# Altium PCB pickit.PcbDoc
Units mm, origin at the board's own origin, x right, y up, seen from the top; angles counter-clockwise.
Board outline 56 x 91 mm, 2 copper layers (Top Layer, Bottom Layer); 73 components, 57 nets, 243 pads, 48 vias.
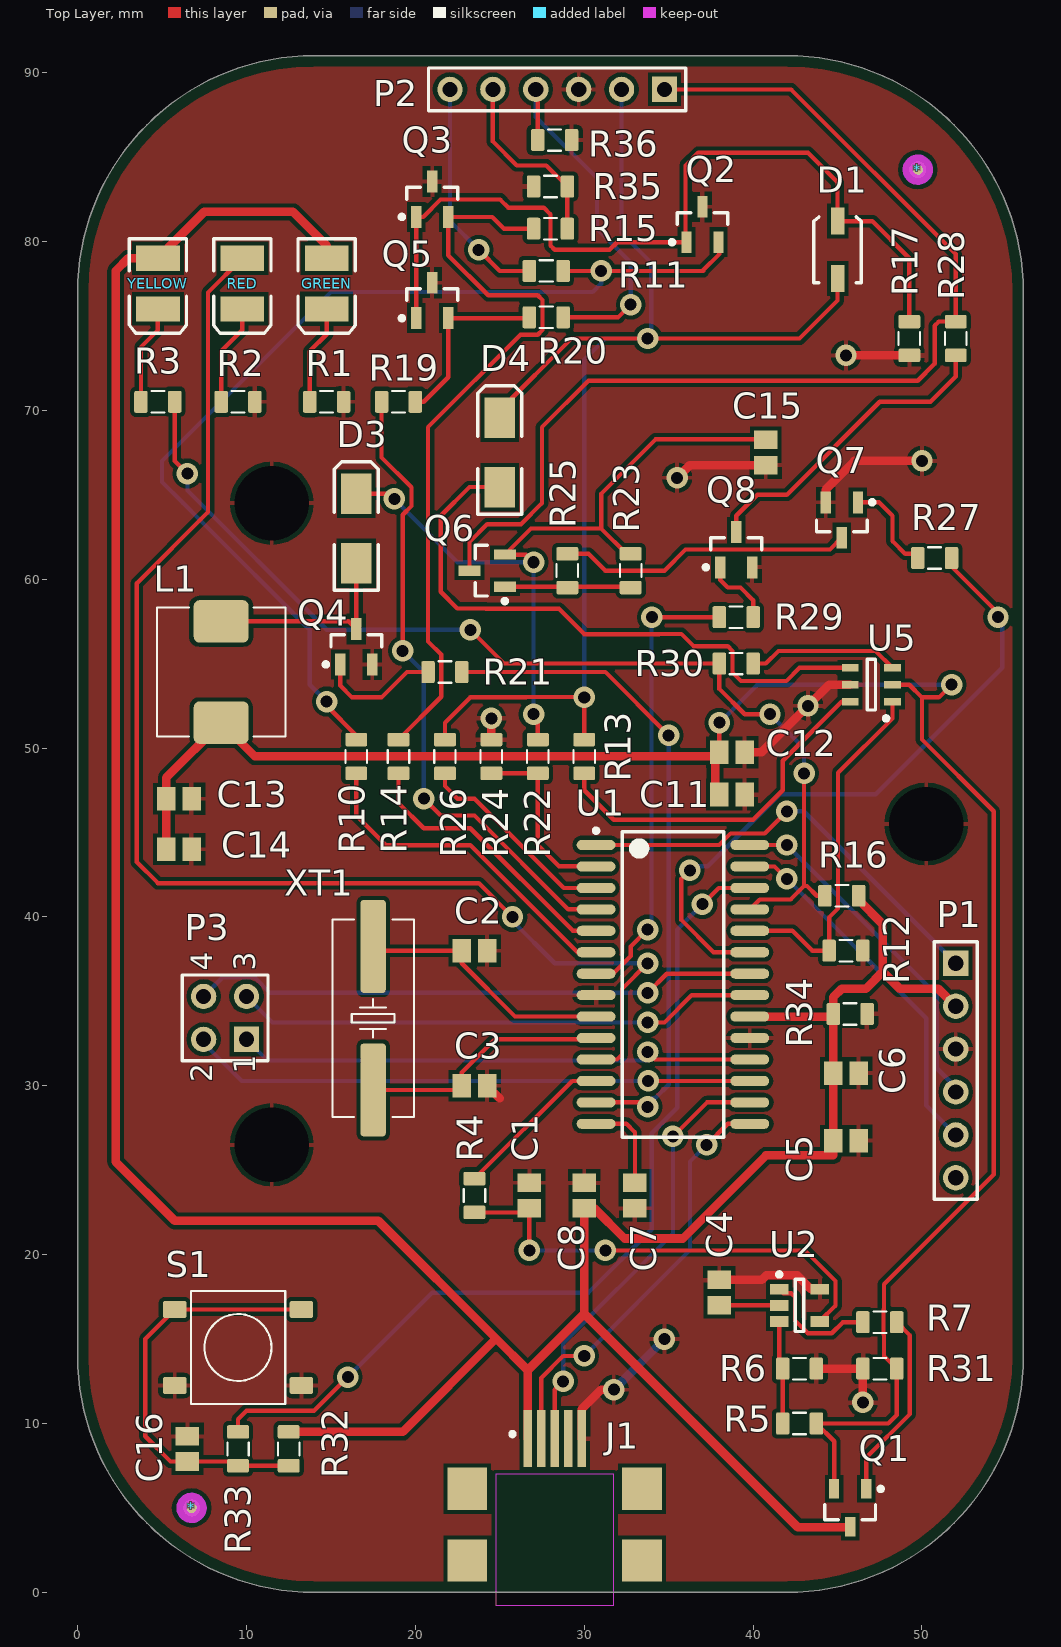
[diagram p0: Top Layer view]
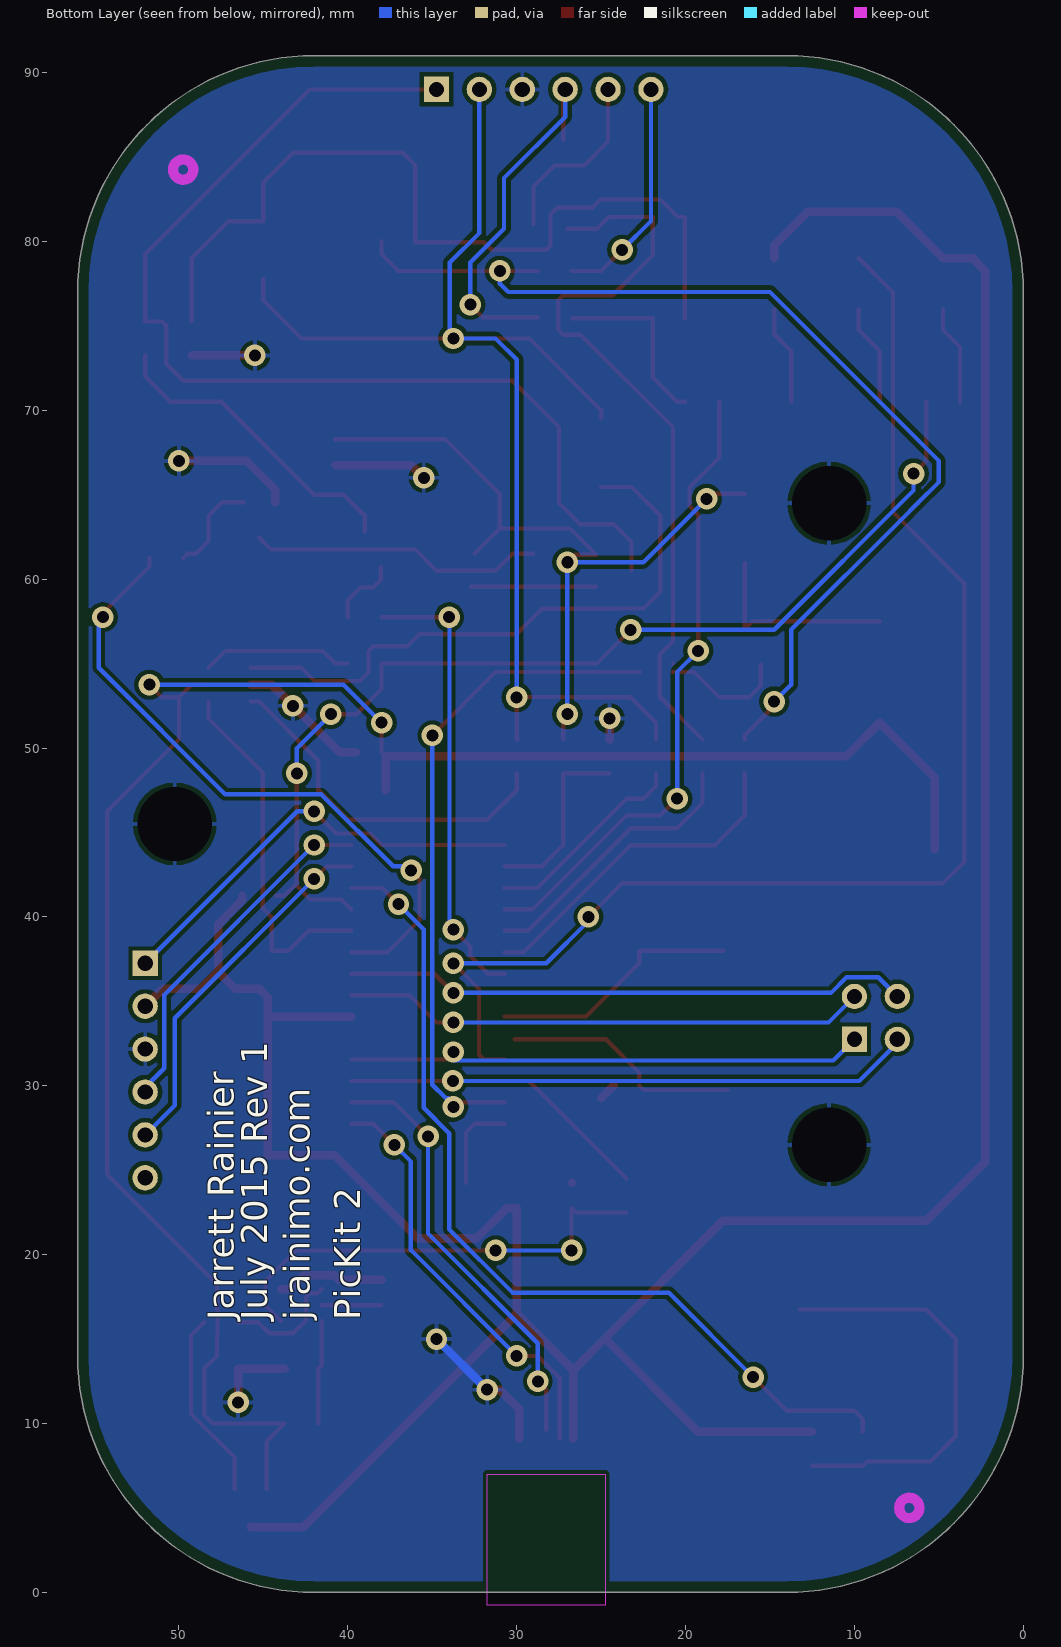
[diagram p1: Bottom Layer view, seen from below]
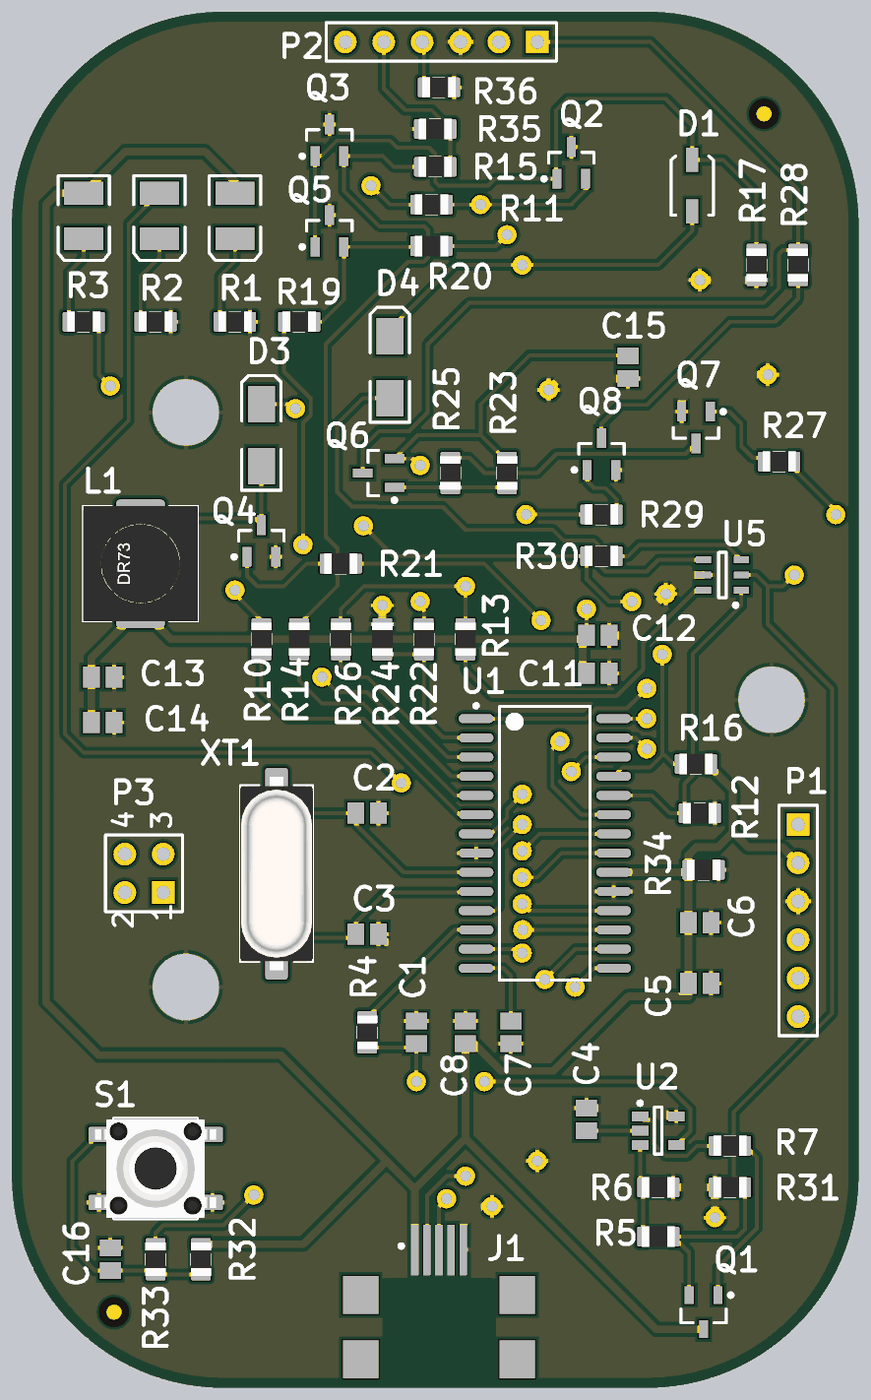
[diagram p2: 3D render of the assembled board from above, using the file's embedded part models]

## Layer stack, top to bottom
Top Layer: signal copper 0.0356
Dielectric: dielectric 0.32, FR-4, Dk 4.8
Bottom Layer: signal copper 0.0356

## Board outline
14,0 cw(c14,14) 0,14 0,77 cw(c14,77) 14,91 42,91 cw(c42,77) 56,77 56,14 cw(c42,14) 42,0

## Design rules (kind name [scope] priority, off if disabled: settings)
Clearance [All] p1: gap=0.254
PolygonConnect [All] p1: connectstyle=Relief reliefconductorwidth=0.254 reliefentries=4 polygonreliefangle="90 Angle"
RoutingVias [All] p1: holewidth=0.711 width=1.27 viastyle="Through Hole" minholewidth=0.711 minwidth=1.27 maxholewidth=0.711 maxwidth=1.27
SilkscreenOverComponentPads [All] p1: minsilkscreentomaskgap=0.254
SolderMaskExpansion [All] p1: expansion=0.102
Width [All] p1: maxlimit=0.508 minlimit=0.254 preferedwidth=0.254 minimp=50.000000 maximp=50.000000 favimp=50.000000
27 further rules are at their usual default settings.

## Classes and differential pairs
component class p1: C1 C2 C3 C4 C5 C6 C7 C8 C16 GREEN J1 P1 P3 Q1 R1 R2 R3 R4 R5 R6 R7 R31 R32 R33 R34 RED S1 U1 U2 XT1 YELLOW
component class p2: C11 C12 C13 C14 C15 D1 D3 D4 L1 P2 Q2 Q3 Q4 Q5 Q6 Q7 Q8 R10 R11 R12 R13 R14 R15 R16 R17 R19 R20 R21 R22 R23 R24 R25 R26 R27 R28 R29 R30 R35 R36 U5 U6

## Components (designator, comment, footprint, x,y, rotation, side; value= is the part's Value field where it differs from the comment)
* "FIDU - ROUND" FIDU-ROUND 6.75,5 r0 top
* "FIDU - ROUND" FIDU-ROUND 49.75,84.25 r0 top
C1 "Cap Pol3" C0805 30,23.5 r90 top
C2 "Cap Pol3" C0805 23.5,38 r0 top
C3 "Cap Pol3" C0805 23.5,30 r0 top
C4 "Cap Pol3" C0805 38,17.75 r90 top
C5 "Cap Pol3" C0805 45.5,26.75 r0 top
C6 "Cap Pol3" C0805 45.5,30.75 r0 top
C7 "Cap Pol3" C0805 33,23.5 r270 top
C8 "Cap Pol3" C0805 26.75,23.5 r90 top
C11 "Cap Pol3" C0805 38.75,47.25 r0 top
C12 "Cap Pol3" C0805 38.75,49.75 r0 top
C13 "Cap Pol3" C0805 6,47 r0 top
C14 "Cap Pol3" C0805 6,44 r0 top
C15 "Cap Pol3" C0805 40.75,67.5 r270 top
C16 "Cap Pol3" C0805 6.5,8.5 r90 top
D1 "1n4148" SOD-123 45,79.5 r90 top
D3 "SS14" SMA 16.5,63 r90 top
D4 "SS14" SMA 25,67.5 r90 top
GREEN "POWER" 3.5X2.8X1.9 14.75,77.5 r270 top
J1 "MiniUSB" microusb 28.25,5.75 r270 top
L1 "680uH" IND_WW_DR73 8.5,54.5 r90 top
P1 "Header 6" HDR1X6 52,37.25 r270 top
P2 "Header 6" HDR1X6 34.75,89 r180 top
P3 "Header 2X2" HDR2X2 10,32.75 r90 top
Q1 "IRLML6401" Micro3_N 45.75,5 r270 top
Q2 "MMBT3906" SOT23_N 37,81 r90 top
Q3 "MMBT3906" SOT23_N 21,82.5 r90 top
Q4 "MMBT3904" SOT23_N 16.5,56 r90 top
Q5 "MMBT3906" SOT23_N 21,76.5 r90 top
Q6 "MMBT3906" SOT23_N 24.25,60.5 r180 top
Q7 "MMBT3904" SOT23_N 45.25,63.5 r270 top
Q8 "MMBT3904" SOT23_N 39,61.75 r90 top
R1 "Res3" RESC2012X70N 14.75,70.5 r180 top
R2 "Res3" RESC2012X70N 9.5,70.5 r180 top
R3 "Res3" RESC2012X70N 4.75,70.5 r180 top
R4 "Res3" RESC2012X70N 23.5,23.5 r90 top
R5 "Res3" RESC2012X70N 42.75,10 r0 top
R6 "Res3" RESC2012X70N 42.75,13.25 r0 top
R7 "Res3" RESC2012X70N 47.5,13.25 r0 top
R10 "Res3" RESC2012X70N 16.5,49.5 r90 top
R11 "Res3" RESC2012X70N 27.75,78.25 r180 top
R12 "Res3" RESC2012X70N 45.5,38 r0 top
R13 "Res3" RESC2012X70N 30,49.5 r90 top
R14 "Res3" RESC2012X70N 19,49.5 r90 top
R15 "Res3" RESC2012X70N 28,80.75 r0 top
R16 "Res3" RESC2012X70N 45.25,41.25 r180 top
R17 "Res3" RESC2012X70N 49.25,74.25 r270 top
R19 "Res3" RESC2012X70N 19,70.5 r0 top
R20 "Res3" RESC2012X70N 27.75,75.5 r0 top
R21 "Res3" RESC2012X70N 21.75,54.5 r0 top
R22 "Res3" RESC2012X70N 27.25,49.5 r90 top
R23 "Res3" RESC2012X70N 32.75,60.5 r90 top
R24 "Res3" RESC2012X70N 24.5,49.5 r270 top
R25 "Res3" RESC2012X70N 29,60.5 r270 top
R26 "Res3" RESC2012X70N 21.75,49.5 r90 top
R27 "Res3" RESC2012X70N 50.75,61.25 r0 top
R28 "Res3" RESC2012X70N 52,74.25 r90 top
R29 "Res3" RESC2012X70N 39,57.75 r180 top
R30 "Res3" RESC2012X70N 39,55 r0 top
R31 "Res3" RESC2012X70N 47.5,16 r0 top
R32 "Res3" RESC2012X70N 12.5,8.5 r270 top
R33 "Res3" RESC2012X70N 9.5,8.5 r90 top
R34 "Res3" RESC2012X70N 45.75,34.25 r180 top
R35 "Res3" RESC2012X70N 28,83.25 r0 top
R36 "Res3" RESC2012X70N 28.25,86 r180 top
RED "BUSY" 3.5X2.8X1.9 9.75,77.5 r270 top
S1 "TS-1143S-WP" TS-1143S 9.5,14.5 r0 top
U1 "PIC18F2550-I/SO" SOIC-SO28_N 35.25,36 r0 top
U2 "MCP6001T-I/OT" SOT-23-OT5_N 42.75,17 r0 top
U5 "FDC6420C" SSOT23 47,53.75 r180 top
XT1 "20.00MHz" CRYSTAL_HC49-US-SM 17.5,34 r90 top
YELLOW "TARGET" 3.5X2.8X1.9 4.75,77.5 r270 top

## Footprints (in the part's own frame and the unit in brackets; to place one, negate y for a bottom-side part, rotate by r counter-clockwise, add the part's x,y. Pads: shape width x height; smd on the part's side, far side on the other; paste and mask are expansions set on the pad)
3.5X2.8X1.9 [mm] "SM LED; 2 C-Bend Leads; Body 3.5 x 2.8 x 1.9 mm, inc leads (LxWxH typ)"
  rect 1.5x2.6 smd: 1(-1.5,0) 2(1.5,0)
  silkscreen extent -2.65,-1.7 2.95,1.7
C0805 [mm] "Chip Capacitor, Body 2.0x1.3mm, IPC High Density"
  rect 1.1x1.4 smd: 1(-0.75,0) 2(0.75,0)
  body extent -1.1,-0.72 1.1,0.72, height 1.4
CRYSTAL_HC49-US-SM [mm] "SMD Crystal HC49/US-SM package"
  round 0.508 on Mech15: 0(0,0)
  rrect25% 5.5x1.5 smd: 1(-4.25,0) 2(4.25,0)
  silkscreen extent -5.84,-2.41 5.84,2.41, body extent -6.4,-2.41 6.4,2.42, height 4.29
FIDU-ROUND [mm]
  round 1 smd paste-0.508 mask+0.508: 1(0,0)
  Keep-Out Layer circle w0.6: c0,0 r0.6
HDR1X6 [mm] "Connector; Header; 6 Position"
  rect 1.5x1.5 hole 0.9: 1(0,0)
  round 1.5 hole 0.9: 2(2.54,0) 3(5.08,0) 4(7.62,0) 5(10.16,0) 6(12.7,0)
  silkscreen extent -1.27,-1.27 13.97,1.27
HDR2X2 [mm] "Connector; Header; 2x2 Position"
  rect 1.5x1.5 hole 0.9: 1(0,0)
  round 1.5 hole 0.9: 2(0,2.54) 3(2.54,0) 4(2.54,2.54)
  silkscreen extent -1.27,-1.27 3.81,3.81
IND_WW_DR73 [mm] "Wire-wound power inductor, Cooper Bussmann DR73 series, IPC Medium Density"
  round 0.5 on Mech15: 0(0,0)
  rrect25% 2.5x3.25 smd: 1(-3,0) 2(3,0)
  silkscreen extent -3.81,-3.81 3.81,3.81, body extent -3.8,-3.8 3.8,3.8, height 3.55
Micro3_N [mm] "SOT23, 3-Leads, Body 2.9x1.3mm, Pitch 0.95mm, Lead Span 2.3mm, IPC Medium Density"
  rect 1.15x0.6 smd: 1(-1.125,0.95) 2(-1.125,-0.95) 3(1.125,0)
  silkscreen extent -1.25,-1.5 0.7,1.93, body extent -0.7,-1.5 0.7,1.5, height 1.12
microusb [mm] "Connector; USB Mini-B, Sinking Type, SM; 5 Position; Right Angle"
  rect 3.35x0.5 smd mask+0.05: 1(-3.362,-1.6) 2(-3.362,-0.8) 3(-3.362,0) 4(-3.362,0.8)
  rect 3.35x0.5 smd paste+0 mask+0.05: 5(-3.362,1.6)
  rect 2.5x2.35 smd: MH1(-0.387,-5.175) MH2(3.863,-5.175) MH3(3.863,5.175) MH4(-0.387,5.175)
  Keep-Out Layer region: -1.25,-3.5 6.5,-3.5 6.5,3.5 -1.25,3.5
  silkscreen extent -3.75,-2.62 -3.5,-2.37, body extent -1.5,-3.85 6.8,3.86, height 0.35
RESC2012X70N [mm] "Chip Resistor, Body 2.0x1.2mm, EIA 0805, IPC Medium Density"
  round 0.254 on Mech15: 0(0,0)
  rrect25% 0.8x1.3 smd: 1(-1,0) 2(1,0)
  Top Layer pour cut-out: -0.725,0.65 -0.525,0.85 0.525,0.85 0.725,0.65 0.725,-0.65 0.525,-0.85 -0.525,-0.85 -0.725,-0.65
  silkscreen extent -0.38,-0.64 0.38,0.63, body extent -1.1,-0.67 1.1,0.68, height 0.69
SMA [mm] "DO-214-AC/SMA; 2 C-Bend Leads; Body 5 x 2.7 mm, inc. leads (LxW)"
  rect 2.4x1.8 smd: 1(-2.05,0) 2(2.05,0)
  silkscreen extent -3.65,-1.3 3.95,1.3
SOD-123 [mm] "SOD-123; 2 Leads; Body 2.7 x 1.6 mm, (LxW)"
  rect 1.6x0.8 smd: 1(-1.7,0) 2(1.7,0)
  silkscreen extent -1.95,-1.4 1.95,1.4
SOIC-SO28_N [mm] "SOIC, 28-Leads, Body 17.9x7.5mm, Pitch 1.27mm, IPC Medium Density"
  oval 2.3x0.6 smd: 1(-4.55,8.255) 2(-4.55,6.985) 3(-4.55,5.715) 4(-4.55,4.445) 5(-4.55,3.175) 6(-4.55,1.905) 7(-4.55,0.635) 8(-4.55,-0.635) 9(-4.55,-1.905) 10(-4.55,-3.175) 11(-4.55,-4.445) 12(-4.55,-5.715) 13(-4.55,-6.985) 14(-4.55,-8.255) 15(4.55,-8.255) 16(4.55,-6.985) 17(4.55,-5.715) 18(4.55,-4.445) 19(4.55,-3.175) 20(4.55,-1.905) 21(4.55,-0.635) 22(4.55,0.635) 23(4.55,1.905) 24(4.55,3.175) 25(4.55,4.445) 26(4.55,5.715) 27(4.55,6.985) 28(4.55,8.255)
  silkscreen extent -4.67,-9.05 3,9.23, body extent -3.8,-9.06 3.8,9.06, height 2.65
SOT23_N [mm] "SOT23, 3-Leads, Body 2.9x1.3mm, Pitch 0.95mm, Lead Span 2.3mm, IPC Medium Density"
  rect 1.3x0.6 smd: 1(-1.05,0.95) 2(-1.05,-0.95) 3(1.05,0)
  silkscreen extent -1.17,-1.5 0.7,1.92, body extent -0.7,-1.5 0.7,1.5, height 1.1
SOT-23-OT5_N [mm] "SOT23, 5-Leads, Body 2.9x1.6mm, Pitch 0.95mm, Lead Span 2.7mm, IPC Medium Density"
  rect 1.1x0.65 smd: 1(-1.2,0.95) 2(-1.2,0) 3(-1.2,-0.95) 4(1.2,-0.95) 5(1.2,0.95)
  silkscreen extent -1.32,-1.55 0.25,1.95, body extent -0.9,-1.55 0.9,1.55, height 1.45
SSOT23 [mm] "Super SOT-3"
  rect 1x0.45 smd: 1(-1.25,1) 2(-1.25,0) 3(-1.25,-1) 4(1.25,-1) 5(1.25,0) 6(1.25,1)
  silkscreen extent -1,-1.5 0.25,2.12, body extent -0.75,-1.5 0.75,1.5, height 2.6
TS-1143S [mm] "6.5x6.5mm SMD tact switch 4.3mm stem"
  round 0.508 on Mech15: 0(0,0)
  rrect25% 1.4x1 smd: 1(-3.75,2.25) 1(3.75,2.25) 2(-3.75,-2.25) 2(3.75,-2.25)
  silkscreen extent -2.79,-3.35 2.79,3.35, body extent -4,-3.25 4,3.25, height 4.3

## Part data
C1 C2 C3 C4 C5 C6 C7 C8 C11 C12 C13 C14 C15 C16: "Polarized Capacitor (Surface Mount)"
D1: library part BZT52C47, "Surface Mount Zener Diode"
D3 D4: library part 10MQ060N, "Schottky Rectifier"
GREEN RED YELLOW: library part LED3, "Typical BLUE SiC LED"
J1: library part MicroUSB, "USB On-The-Go (OTG) Mini-B Receptacle, Right Angle, SMT, 0.80mm (.031\") Pitch, Solder Tabs with Back Cover, Recessed Type"
L1: library part INDC_10u_DR73-100-R, "Inductor Power 10µH 2.1A 7.6x7.6mm SMD"
P1 P2: "Header, 6-Pin"
P3: "Header, 2-Pin, Dual row"
Q1: "HEXFET Power MOSFET"
Q2 Q3 Q5 Q6: "PNP Switching Transistor"
Q4 Q7 Q8: "NPN Switching Transistor"
R1 R2 R3 R4 R5 R6 R7 R10 R11 R12 R13 R14 R15 R16 R17 R19 R20 R21 R22 R23 R24 R25 R26 R27 R28 R29 R30 R31 R32 R33 R34 R35 R36: "Resistor"
S1: library part SW_SMD_PB_4.3mm, "Switch SMD Tact 4.3mm Stem"
U1: "High Performance, Enhanced Flash, USB Microcontroller with nanoWatt Technology, 32K Flash, 28-Pin SOIC, Industrial Temperature Range"
U2: "1 MHz, Low-Power Operational Amplifier, 5-Pin SOT-23, Industrial Temperature, Tape and Reel"
XT1: library part Crystal_6MHz_HC49/US, "Resonator Ceramic 6.00 MHz 30ppm"

## Free pads (board coordinates)
  round 1.524 hole 4.4: 0(11.5,26.5) 0(11.5,64.5) 0(50.25,45.5)

## Via types
v1: diameter 1.27, hole 0.711, Top Layer to Bottom Layer, 48 vias

## Nets (pads, with @x,y where several pads share a name; then routed paths per layer and width w, separated by ;. In a path a pad name is that pad's centre, name@x,y a point inside that pad or via, vN(x,y) a via of type N, cw(c..) or ccw(c..) an arc to the next point about the centre after c; other vN are vias at no path point)
AUX: R10.1 U1.6 | length 20.1
  Top Layer w0.254: R10.1 16.5,46 18.25,44.25 23.25,44.25 29.595,37.905 U1.6
D+: J1.3 U1.16 | length 25.7
  Top Layer w0.254: J1.3@28.25,9.613 28.25,12 v1(28.75,12.5) ; v1(35.25,27) 37.265,29.015 U1.16
  Bottom Layer w0.254: v1(28.75,12.5) 28.75,14.75 35.25,21.25 v1(35.25,27)
D-: J1.2 U1.15 | length 25.2
  Top Layer w0.254: J1.2 27.45,12.7 28.75,14 v1(30,14) ; v1(37.25,26.5) 38.495,27.745 U1.15
  Bottom Layer w0.254: v1(30,14) 36.266,20.266 36.266,25.516 v1(37.25,26.5)
GND: C1.2 C2.2 C3.2 C4.2 C5.2 C6.2 C7.2 C8.2 C11.2 C12.2 C13.2 C14.2 C15.2 C16.2 J1.5 P1.3 P2.3 pad.0 Q2.3 Q3.3 Q4.2 Q5.3 Q7.2 Q8.2 R1.1 R2.1 R6.2 R7.1 R12.2 R17.2 R24.1 R34.1 R35.1 R36.1 S1.2 U1.8 U1.19 U2.5 U5.5 | length 46.5
  Top Layer w0.508: C3.2 25,29.25 ; R24.1 v1(24.5,51.75) ; J1.5 29.85,10.85 31,12 v1(31.75,12) ; v1(35.5,66) 36.25,66.75 C15.2 ; C4.2 40.507,18.5 40.79,18.783 42.601,18.783 43.434,17.95 U2.5 ; C12.2 40.5,49.75 v1(43.25,52.5) 44.5,53.75 U5.5 ; R6.2 R7.1 v1(46.5,11.25) ; Q7.2 44.3,65.3 46,67 v1(50,67) ; v1(45.5,73.25) R17.2
  Bottom Layer w0.508: v1(24.5,51.75) v1@24.5,52 ; v1(31.75,12) v1(34.75,15)
ICSPCLK: R14.1 U1.5 | length 16.6
  Top Layer w0.254: R14.1 19,46.75 20.5,45.25 23.25,45.25 29.325,39.175 U1.5
ICSPDAT: R19.1 U1.4 | length 37.9
  Top Layer w0.254: R19.1 18,67.203 19.766,65.437 19.766,64.329 19.25,63.813 v1(19.25,55.75) ; v1(20.5,47) 21.5,46 23.5,46 29.055,40.445 U1.4
  Bottom Layer w0.254: v1(19.25,55.75) 20.5,54.5 v1(20.5,47)
MCLR: P1.1 U1.1 | length 25.9
  Top Layer w0.254: U1.1 37.987,44.255 38.668,44.936 40.686,44.936 v1(42,46.25)
  Bottom Layer w0.254: v1(42,46.25) 43,46.25 P1.1
MCLR_TGT: R29.2 U1.7 | length 26.6
  Top Layer w0.254: U1.7 31.698,36.635 32.75,37.687 32.75,38.25 v1(33.75,39.25) ; v1@34.5,57.75 R29.2
  Bottom Layer w0.254: v1(33.75,39.25) 33.984,39.484 33.984,57.734 v1(34,57.75)
NetC4_1: C4.1 U2.2 | length 3.5
  Top Layer w0.254: C4.1 U2.2
NetC7_1: C7.1 U1.14 | length 5.5
  Top Layer w0.254: U1.14 32.495,27.745 33,27.24 C7.1
NetC8_1: C8.1 R4.1 U2.4 | length 27.5
  Top Layer w0.254: R4.1 26.5,22.5 C8.1 v1(26.75,20.25) ; v1(31.25,20.25) 43.064,20.25 44.881,18.433 44.881,16.981 U2.4
  Bottom Layer w0.254: v1(26.75,20.25) v1(31.25,20.25)
NetC15_1: C15.1 D3.2 Q6.2 R22.2 R23.2 | length 46.3
  Top Layer w0.254: D3.2 18.45,65.05 v1(18.75,64.75) ; v1(27,52) 27.25,51.75 R22.2 ; v1(27,61) 26.55,61.45 Q6.2 26.85,63 31,63 ; R23.2@32.5,61.5 31,63 ; C15.1 40.725,68.275 34.225,68.275 31,65.05 31,63
  Bottom Layer w0.254: v1(18.75,64.75) 22.5,61 v1(27,61) v1(27,52)
NetC16_1: C16.1 R32.2 R33.1 S1.1 | length 24.9
  Top Layer w0.254: R32.2 R33.1 9.25,7.75 C16.1 5.5,7.75 4,9.25 4,15 5.75,16.75 S1.1@13.25,16.75
NetD1_1: D1.1 D4.2 P2.2 R13.2 R26.2 | length 76.7
  Top Layer w0.254: R26.2 21.75,51.5 23.25,53 26.563,53 26.579,53.016 30,53.016 v1(30,53) R13.2 R13.2@29.937,50.5 ; D4.2 25,70 29.25,74.25 v1(33.75,74.25) 42.75,74.25 45,76.5 D1.1
  Bottom Layer w0.254: v1(30,53) 30,73 31.25,74.25 v1(33.75,74.25) 33.96,74.46 33.96,78.75 32.21,80.5 P2.2
NetD1_2: D1.2 Q2.1 Q3.1 Q5.1 R17.1 | length 50.7
  Top Layer w0.254: Q5.1 Q3.1 20.461,81.45 21.492,82.481 25.019,82.481 25.5,82 27.6,82 28,81.6 28,79.75 28.25,79.5 31.5,79.5 31.95,79.95 36,79.95 36,84.5 36.75,85.25 43.25,85.25 45,83.5 D1.2 47.05,81.2 49.25,79 R17.1
NetD3_1: D3.1 L1.2 Q4.3 | length 12.1
  Top Layer w0.254: L1.2 16.05,57.5 Q4.3 D3.1
NetD4_1: D4.1 U5.4 | length 36.3
  Top Layer w0.254: D4.1 23.2,65.45 21.5,63.75 21.5,59.25 22.484,58.266 24.171,58.266 24.187,58.25 28.5,58.25 30.016,56.734 34.421,56.734 34.437,56.75 35.75,56.75 36.469,56.031 38.499,56.031 38.781,55.749 38.781,54.469 39.281,53.969 41.969,53.969 42.75,54.75 U5.4 U5.4@45.719,54.719
NetGREEN_2: GREEN.2 R1.2 | length 5.9
  Top Layer w0.254: R1.2 13.75,73.5 14.75,74.5 GREEN.2
NetP2_1: P2.1 Q6.3 R28.2 | length 65.1
  Top Layer w0.254: Q6.3 23.2,62.2 24.25,63.25 26.25,63.25 27.5,64.5 27.5,69 30.25,71.75 49.75,71.75 50.75,72.75 50.75,75 51,75.25 R28.2 52,79.25 42.25,89 P2.1
NetP2_4: P2.4 R20.2 R36.2 | length 22.4
  Top Layer w0.254: P2.4 27.25,88.88 R36.2 ; R20.2 32,75.5 v1(32.75,76.25)
  Bottom Layer w0.254: P2.4 27.13,87.37 30.75,83.75 30.75,80.75 32.75,78.75 v1(32.75,76.25)
NetP2_5: P2.5 R15.2 R35.2 | length 10.9
  Top Layer w0.254: P2.5 24.59,85.91 26,84.5 27.75,84.5 R35.2 R15.2@29,81
NetP2_6: P2.6 R11.2 | length 13.7
  Top Layer w0.254: v1(23.75,79.5) 25,78.25 R11.2
  Bottom Layer w0.254: P2.6 22.05,81.2 v1(23.75,79.5)
NetQ1_1: Q1.1 R31.2 | length 11.3
  Top Layer w0.254: Q1.1 46.7,7.982 49.281,10.563 49.281,15.219 R31.2
NetQ2_2: Q2.2 R10.2 R11.1 | length 62.8
  Top Layer w0.254: v1(14.75,52.75) 14.75,52.5 16.5,50.75 R10.2 ; R11.1 37.05,78.25 ; 37.05,78.3 38,79.25 Q2.2@38,80
  Bottom Layer w0.254: v1(14.75,52.75) 13.75,53.75 13.75,57 7.25,63.5 6.25,64.5 5,65.75 5,67 15,77 15.813,77 30.5,77 31,77.5 v1(31,78.25)
NetQ3_2: Q3.2 R14.2 R15.1 | length 45.1
  Top Layer w0.254: R14.2 21.531,53.031 21.531,55.531 20.75,56.312 20.75,69 26.219,74.469 27.249,74.469 27.531,74.751 27.531,76.53 27.25,76.811 24.311,76.811 21.95,79.172 Q3.2 24.55,81.45 25.25,80.75 R15.1
NetQ4_1: Q4.1 R21.1 | length 7.4
  Top Layer w0.254: Q4.1 15.55,53.7 16.25,53 18,53 19.5,54.5 R21.1
NetQ5_2: Q5.2 R19.2 R20.1 | length 10.8
  Top Layer w0.254: R19.2 20.5,70.5 21.95,71.95 Q5.2 R20.1@26.7,75.45
NetQ6_1: Q6.1 R23.1 R25.2 | length 7.4
  Top Layer w0.254: Q6.1 R23.1@32.7,59.55
NetQ7_1: Q7.1 R27.1 | length 5.8
  Top Layer w0.254: Q7.1 47.45,64.55 48.25,63.75 48.25,62.25 49,61.5 49.5,61.5 R27.1
NetQ7_3: Q7.3 R25.1 | length 17.5
  Top Layer w0.254: R25.1 30.25,61.5 31.25,60.5 34.75,60.5 36,61.75 44.55,61.75 Q7.3
NetQ8_1: Q8.1 R29.1 | length 4.2
  Top Layer w0.254: Q8.1 38.05,59.95 38.5,59.5 39.25,59.5 40,58.75 R29.1
NetQ8_3: Q8.3 R28.1 | length 18.6
  Top Layer w0.254: Q8.3 39,63.75 40.25,65 42,65 47.5,70.5 50.5,70.5 52,72 R28.1
NetR2_2: R2.2 RED.2 | length 6
  Top Layer w0.254: R2.2 8.5,73.5 9.75,74.75 RED.2
NetR3_2: R3.2 YELLOW.2 | length 5.9
  Top Layer w0.254: R3.2 3.75,73.75 4.75,74.75 YELLOW.2
NetR5_1: R5.1 R6.1 U2.3 | length 6.1
  Top Layer w0.254: U2.3 41.55,13.45 R6.1 R5.1
NetR13_1: R13.1 U5.6 | length 21.4
  Top Layer w0.254: R13.1 30,47.5 31.75,45.75 40,45.75 41.75,47.5 41.75,49.25 45.25,52.75 U5.6
NetR30_2: R30.2 U5.3 | length 9
  Top Layer w0.254: R30.2 40.75,55 41.5,55.75 47.25,55.75 U5.3
NetR31_1: R31.1 U2.1 | length 7.1
  Top Layer w0.254: U2.1 41.794,17.706 42.258,17.706 42.481,17.483 42.481,16.105 43.242,15.344 44.658,15.344 45.314,16 R31.1
NetR33_2: R33.2 U1.26 | length 53.6
  Top Layer w0.254: R33.2 9.5,10.25 10,10.75 14,10.75 v1(16,12.75) ; v1(37,40.75) 37.965,41.715 U1.26
  Bottom Layer w0.254: v1(16,12.75) 21,17.75 30.25,17.75 34,21.5 34,27.187 35.508,28.695 35.508,39.258 v1(37,40.75)
NetRED_1: RED.1 U1.11 | length 78.7
  Top Layer w0.254: RED.1 7.719,76.969 7.719,63.969 3.5,59.75 3.5,43.25 4.75,42 23.75,42 v1(25.75,40) ; U1.11 31.945,31.555 32.231,31.841 32.231,35.731 v1(33.75,37.25)
  Bottom Layer w0.254: v1@25.75,39.75 28.25,37.25 v1(33.75,37.25)
OSC1: C2.1 U1.9 XT1.2 | length 15
  Top Layer w0.254: XT1.2@17.75,38 C2.1 22.75,37.25 25.905,34.095 U1.9
OSC2: C3.1 U1.10 XT1.1 | length 13.8
  Top Layer w0.254: XT1.1 22.5,29.75 C3.1 ; C3.1@22.75,30.5 22.75,30.789 24.717,32.756 U1.10@30.131,32.756
PGC: P1.5 U1.27 | length 21.8
  Top Layer w0.254: U1.27 41.265,42.985 v1(42,42.25)
  Bottom Layer w0.254: v1(42,42.25) 50.25,34 50.25,28.84 P1.5
PGD: P1.4 U1.28 | length 21
  Top Layer w0.254: U1.28 v1(41.995,44.255)
  Bottom Layer w0.254: v1(41.995,44.255) 50.869,35.381 50.869,31.039 52,29.908 P1.4
RX: P3.1 U1.18 | length 31
  Top Layer w0.254: v1(33.75,32) 34.195,31.555 U1.18
  Bottom Layer w0.254: P3.1 11.25,31.5 33.75,31.5 v1(33.75,32)
SCL: P3.4 U1.22 | length 33.7
  Top Layer w0.254: v1@33.5,35.5 v1(33.75,35.5) 34.885,36.635 U1.22
  Bottom Layer w0.254: P3.4 8.591,36.421 10.468,36.421 11.389,35.5 v1@33.5,35.5
SDA: P3.3 U1.21 | length 31.1
  Top Layer w0.254: v1(33.75,33.75) 34.75,33.75 36.365,35.365 U1.21
  Bottom Layer w0.254: P3.3 11.54,33.75 v1(33.75,33.75)
TX: P3.2 U1.17 | length 33.5
  Top Layer w0.254: v1(33.785,30.285) U1.17
  Bottom Layer w0.254: P3.2@7.285,32.715 9.715,30.285 v1(33.785,30.285)
V_TGT: C11.1 C12.1 C13.1 C14.1 L1.1 Q1.2 R5.2 R7.2 U5.2 | length 118
  Top Layer w0.254: C12.1 v1(38,51.5) ; Q1.2 44.8,8.95 R5.2 48,10 48.5,10.5 R7.2 47.75,14 47.75,15.22 47.719,15.251 47.719,16.749 47.75,16.78 47.75,18.25 54.25,24.75 54.25,46.25 50,50.5 50,53 ; U5.2 49.25,53.75 50,53 ; v1(51.75,53.75) 51,53 50,53
  Top Layer w0.508: C14.1 C13.1 5.25,48.25 L1.1 10.5,49.5 37.75,49.5 C11.1@37.75,47.5
  Bottom Layer w0.254: v1(38,51.5) 40.25,53.75 v1(51.75,53.75)
VCC: C1.1 C5.1 C6.1 GREEN.1 J1.1 P1.2 Q1.3 R16.1 R32.1 R34.2 U1.20 YELLOW.1 | length 194.1
  Top Layer w0.508: R32.1 19.25,9.5 24.775,15.025 ; GREEN.1 14.75,79.75 12.75,81.75 7.5,81.75 YELLOW.1 3,79 2.25,78.25 2.25,25.5 5.75,22 17.8,22 24.775,15.025 ; J1.1 26.65,13.15 ; C1.1 29.999,16.499 ; 30,16.5 30.001,16.499 ; C1.1 30.593,22.75 32.387,20.957 35.841,20.957 40.762,25.878 44.75,25.878 C5.1 R34.2@44.75,34.095 ; 30.037,16.499 30.001,16.499 ; U1.20 R34.2@44.75,34.095 ; Q1.3 45.75,3.862 42.638,3.862 30.001,16.499 ; R16.1 46.25,40.997 47.677,39.57 47.677,36.75 ; P1.2 50.96,35.75 48.677,35.75 47.677,36.75 ; 24.775,15.025 26.65,13.15 ; 26.65,13.15 29.999,16.499 ; 29.999,16.499 30.001,16.499 ; R34.2@44.75,34.095 R34.2 44.75,35.25 45.25,35.75 46.677,35.75 47.677,36.75
VDD_TGT_ADJ: R4.2 U1.12 | length 9.6
  Top Layer w0.254: R4.2 29.285,30.285 U1.12
VDD_TGT_FB: R26.1 U1.3 | length 12.2
  Top Layer w0.254: R26.1 21.75,47.75 22.5,47 23.5,47 28.785,41.715 U1.3
VDD_TGT_N: R12.1 U1.24 U5.1 | length 21.5
  Top Layer w0.254: U1.24 42.325,39.175 43.5,38 R12.1 44.5,39.97 45.031,40.501 45.031,48.531 48.25,51.75 U5.1
VDD_TGT_P: R3.1 R16.2 R30.1 U1.25 | length 62.7
  Top Layer w0.254: R3.1 5.75,67 v1(6.5,66.25) v1@6.75,66 ; v1@23.5,56.75 25.242,55.008 37.992,55.008 R30.1 38,53.5 39.5,52 v1(41,52) ; U1.25 40.389,41.034 42.221,41.034 43.016,41.829 ; v1(43.016,48.5) 43.016,41.829 ; R16.2 43.766,41.25 43.187,41.829 43.016,41.829
  Bottom Layer w0.254: v1(6.5,66.25) 6.5,65.25 14.75,57 v1(23.25,57) ; v1(41,52) 43.016,49.984 v1(43.016,48.5)
VPP_FB: R22.1 R24.2 U1.2 | length 12.2
  Top Layer w0.254: R24.2 R22.1 27.25,44.25 28.5,43 30.685,43 U1.2 29.515,42.985
VPP_ON: R27.2 U1.23 | length 39.7
  Top Layer w0.254: v1(36.25,42.75) 35.75,42.25 35.75,39.81 37.655,37.905 U1.23 ; R27.2 51.75,60.75 54.5,58 v1(54.5,57.75)
  Bottom Layer w0.254: v1(36.25,42.75) 36,43 37.313,43 41.579,47.266 47.266,47.266 54.75,54.75 54.75,57.5 v1(54.5,57.75)
VPP_PUMP: R21.2 U1.13 | length 39.6
  Top Layer w0.254: R21.2 29,54.5 31.25,54.5 v1(35,50.75) ; U1.13 33.485,29.015 v1(33.75,28.75)
  Bottom Layer w0.254: v1(33.75,28.75) 33.75,29 34.019,29.269 34.206,29.269 35,30.063 v1(35,50.75)
pads on no net: *.1 J1.4 J1.MH1 J1.MH2 J1.MH3 J1.MH4 L1.0 P1.6 R1.0 R2.0 R3.0 R4.0 R5.0 R6.0 R7.0 R10.0 R11.0 R12.0 R13.0 R14.0 R15.0 R16.0 R17.0 R19.0 R20.0 R21.0 R22.0 R23.0 R24.0 R25.0 R26.0 R27.0 R28.0 R29.0 R30.0 R31.0 R32.0 R33.0 R34.0 R35.0 R36.0 S1.0 XT1.0

## Polygon pours and split planes (outlines as drawn)
GND on Top Layer "Bottom Layer-No Net" (solid, remove dead copper, pour order 22): 0,0 0,91 56,91 56,-0.25 0.75,-0.25 0.5,0
GND on Bottom Layer "Bottom Layer-No Net" (solid, remove dead copper, pour order 24): -0.25,-0.25 0.25,0.25 0.25,91 55.75,91 56,90.75 55.75,90.5 55.75,0

## Silkscreen, mask and mechanical layers (free items; w line width, h text height)
Bottom Overlay:
  region: 49.5,36.5
  text "PicKit 2" at 39.25,16.123 h1.52 r270
  text "jrainimo.com" at 42.258,16.123 h1.52 r270
  text "July 2015 Rev 1" at 44.758,16.123 h1.52 r270
  text "Jarrett Rainier" at 46.75,16.123 h1.52 r270
Mechanical 7:
  lines w0.8: 14,0 cw(c14,14) 0,14 0,77 cw(c14,77) 14,91 ; 15.25,0 40.75,0 ; 15.5,91 40.25,91 ; 42,0 ccw(c42,14) 56,14 56,77 ccw(c42,77) 42,91

## Text inside footprints (layer, text, board x,y; h text height)
P3: Top Overlay "1" at 10.508,30.718 h1.27 r90; Top Overlay "2" at 7.968,30.21 h1.27 r90; Top Overlay "4" at 7.968,36.814 h1.27 r90; Top Overlay "3" at 10.508,36.814 h1.27 r90